# Altium PCB PCB1.PcbDoc
Units mm, origin at the board's own origin, x right, y up, seen from the top; angles counter-clockwise.
Board outline 99.44 x 101 mm, 2 copper layers (Top Layer, Bottom Layer); 111 components, 17 nets, 356 pads, 6 vias.
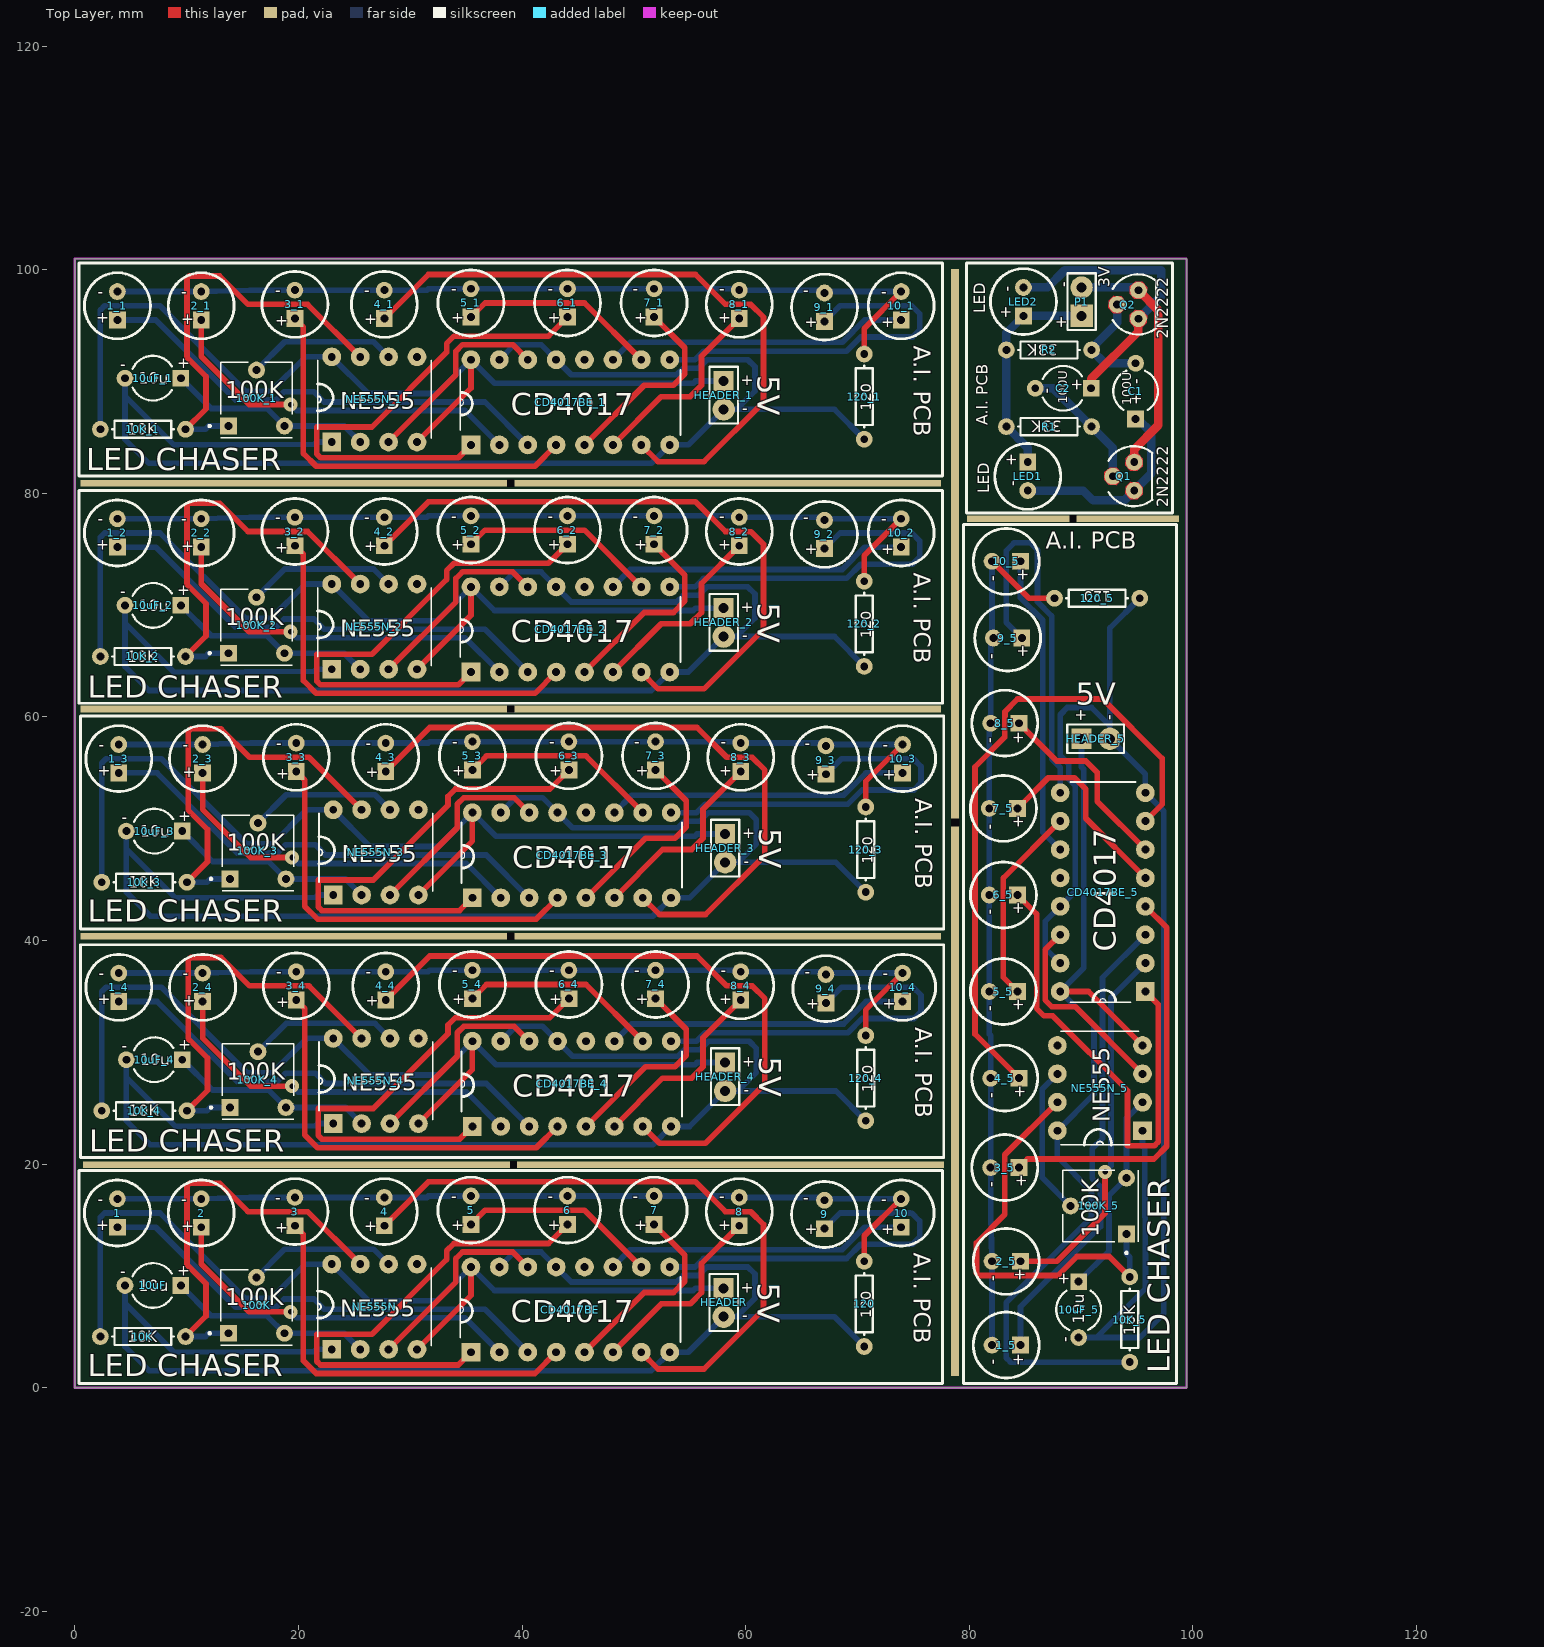
[diagram p0: Top Layer view]
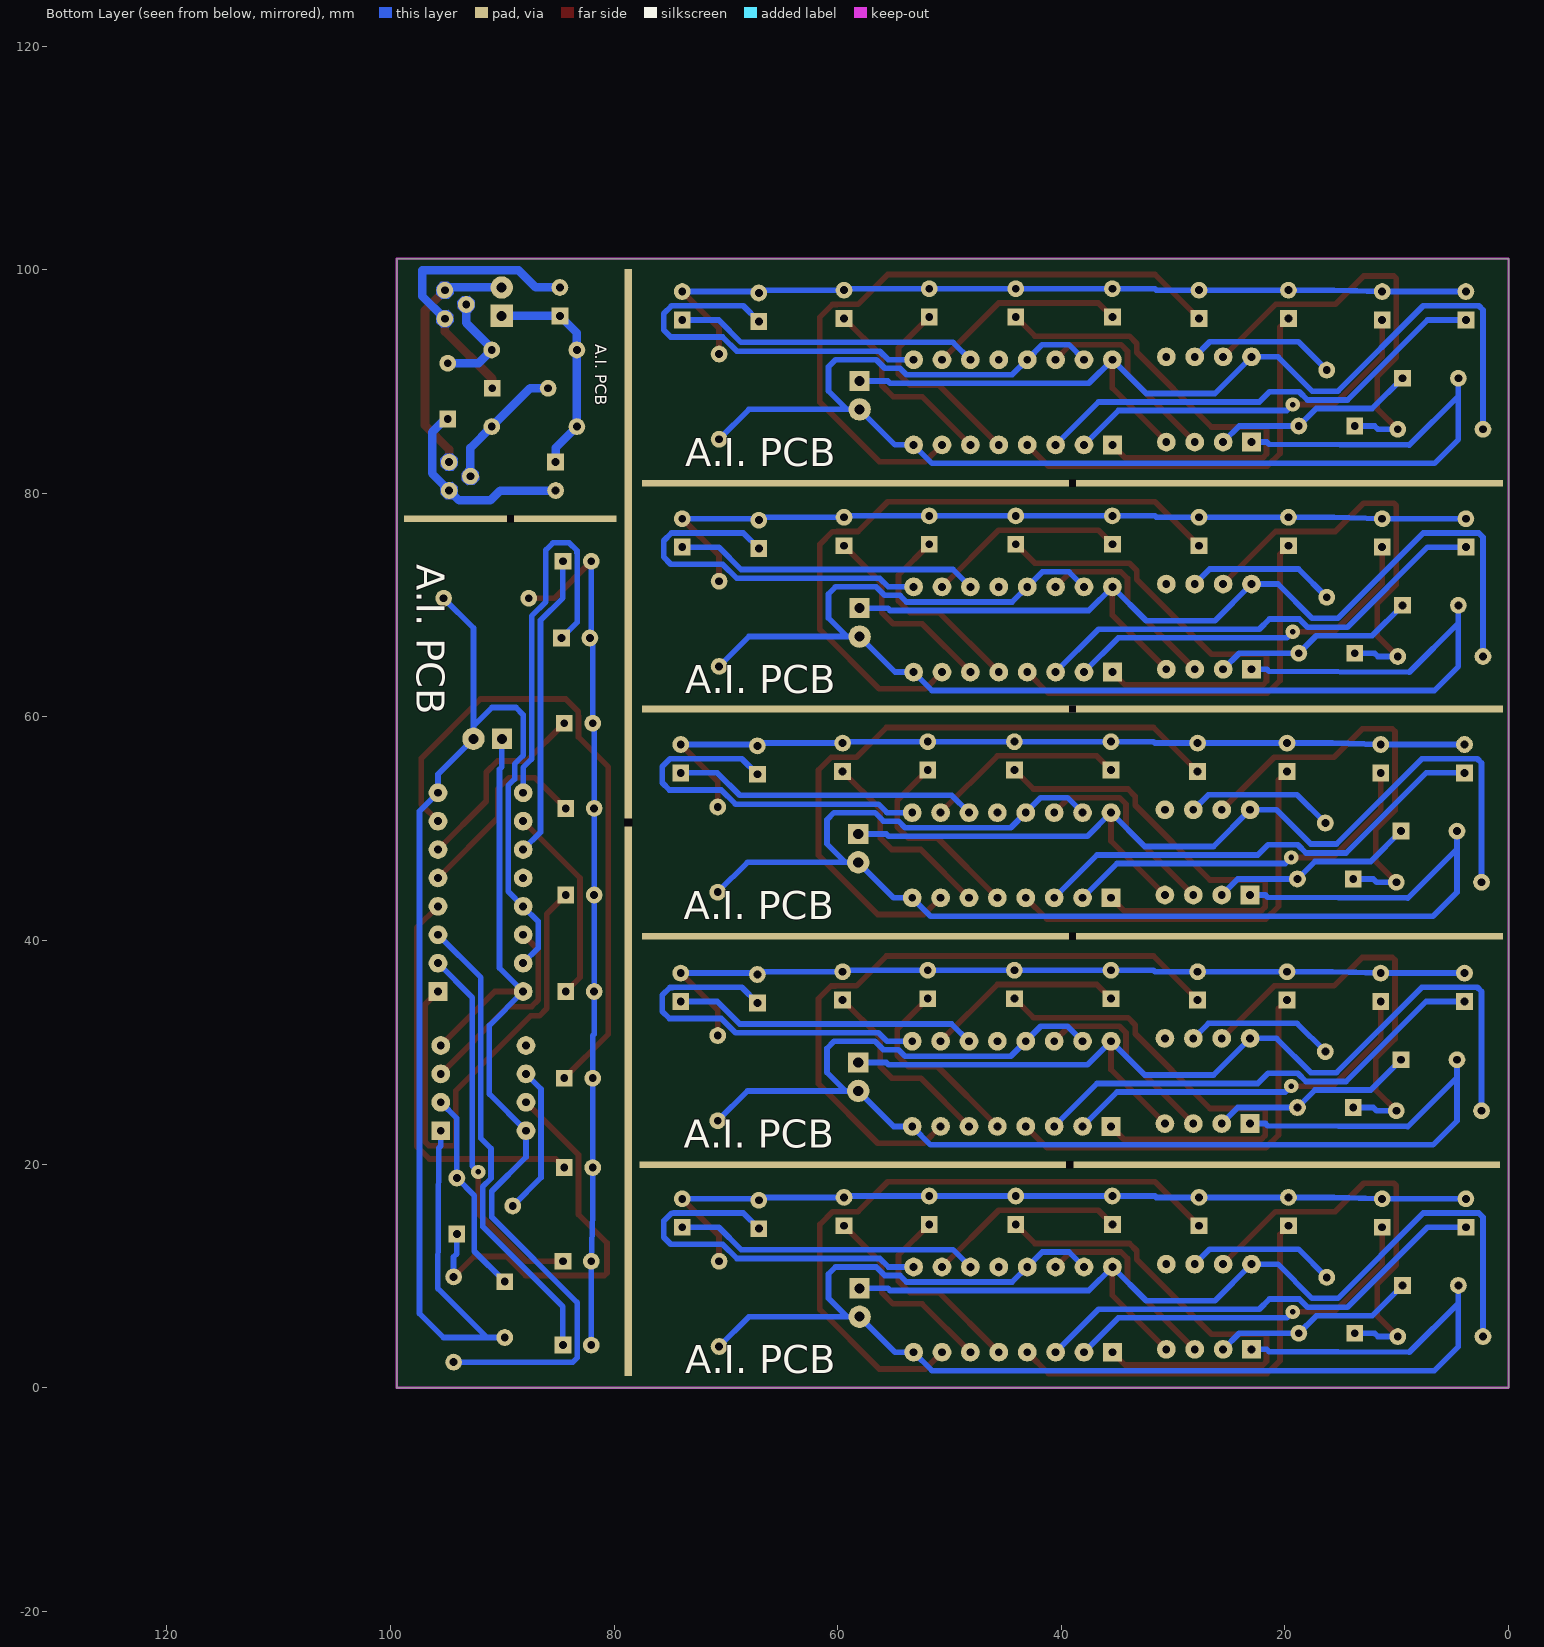
[diagram p1: Bottom Layer view, seen from below]

## Layer stack, top to bottom
Top Solder: solder mask 0.0102, Solder Resist, Dk 3.5
Top Layer: signal copper 0.0356
Dielectric 1: dielectric 0.32, FR-4, Dk 4.8
Bottom Layer: signal copper 0.0356
Bottom Solder: solder mask 0.0102, Solder Resist, Dk 3.5

## Board outline
0,0 0,101 99.441,101 99.441,0

## Design rules (kind name [scope] priority, off if disabled: settings)
Clearance [All] p1: gap=0.254 ignorepadtopadclearanceinfootprint=FALSE except(0: Arc-Hole Track-Hole SMDPad-Hole THPad-Hole Via-Hole Fill-Hole Poly-Hole Region-Hole Text-Hole)
PolygonConnect [All] p1: connectstyle=Relief reliefconductorwidth=0.254 reliefentries=4 polygonreliefangle="90 Angle" airgapwidth=0.254
RoutingVias [All] p1: holewidth=0.711 width=1.27 viastyle="Through Hole" minholewidth=0.711 minwidth=1.27 maxholewidth=0.711 maxwidth=1.27
SolderMaskExpansion [All] p1: expansion=0.102
Width [All] p1: maxlimit=0.762 minlimit=0.254 preferedwidth=0.508
30 further rules are at their usual default settings.

## Classes and differential pairs
component class Sheet1: 1 2 3 4 5 6 7 8 9 10 10K 10uF 100K 120 CD4017BE HEADER LED1 LED2 LED3 LED4 LED5 LED6 LED7 LED8 LED10 LED11 NE555N R1 U1

## Components (designator, comment, footprint, x,y, rotation, side; value= is the part's Value field where it differs from the comment)
1 "1" L-53GD 3.81,15.621 r90 top
1_1 "1" L-53GD 3.81,96.774 r90 top (schematic designator 1)
1_2 "1" L-53GD 3.81,76.454 r90 top (schematic designator 1)
1_3 "1" L-53GD 3.937,56.261 r90 top (schematic designator 1)
1_4 "1" L-53GD 3.937,35.814 r90 top (schematic designator 1)
1_5 "1" L-53GD 83.312,3.81 r180 top (schematic designator 1)
2 "1" L-53GD 11.303,15.621 r90 top
2_1 "1" L-53GD 11.303,96.774 r90 top (schematic designator 2)
2_2 "1" L-53GD 11.303,76.454 r90 top (schematic designator 2)
2_3 "1" L-53GD 11.43,56.261 r90 top (schematic designator 2)
2_4 "1" L-53GD 11.43,35.814 r90 top (schematic designator 2)
2_5 "1" L-53GD 83.312,11.303 r180 top (schematic designator 2)
3 "3" L-53GD 19.685,15.748 r90 top
3_1 "3" L-53GD 19.685,96.901 r90 top (schematic designator 3)
3_2 "3" L-53GD 19.685,76.581 r90 top (schematic designator 3)
3_3 "3" L-53GD 19.812,56.388 r90 top (schematic designator 3)
3_4 "3" L-53GD 19.812,35.941 r90 top (schematic designator 3)
3_5 "3" L-53GD 83.185,19.685 r180 top (schematic designator 3)
4 "4" L-53GD 27.686,15.748 r90 top
4_1 "4" L-53GD 27.686,96.901 r90 top (schematic designator 4)
4_2 "4" L-53GD 27.686,76.581 r90 top (schematic designator 4)
4_3 "4" L-53GD 27.813,56.388 r90 top (schematic designator 4)
4_4 "4" L-53GD 27.813,35.941 r90 top (schematic designator 4)
4_5 "4" L-53GD 83.185,27.686 r180 top (schematic designator 4)
5 "5" L-53GD 35.433,15.875 r90 top
5_1 "5" L-53GD 35.433,97.028 r90 top (schematic designator 5)
5_2 "5" L-53GD 35.433,76.708 r90 top (schematic designator 5)
5_3 "5" L-53GD 35.56,56.515 r90 top (schematic designator 5)
5_4 "5" L-53GD 35.56,36.068 r90 top (schematic designator 5)
5_5 "5" L-53GD 83.058,35.433 r180 top (schematic designator 5)
6 "6" L-53GD 44.069,15.875 r90 top
6_1 "6" L-53GD 44.069,97.028 r90 top (schematic designator 6)
6_2 "6" L-53GD 44.069,76.708 r90 top (schematic designator 6)
6_3 "6" L-53GD 44.196,56.515 r90 top (schematic designator 6)
6_4 "6" L-53GD 44.196,36.068 r90 top (schematic designator 6)
6_5 "6" L-53GD 83.058,44.069 r180 top (schematic designator 6)
7 "7" L-53GD 51.816,15.875 r90 top
7_1 "7" L-53GD 51.816,97.028 r90 top (schematic designator 7)
7_2 "7" L-53GD 51.816,76.708 r90 top (schematic designator 7)
7_3 "7" L-53GD 51.943,56.515 r90 top (schematic designator 7)
7_4 "7" L-53GD 51.943,36.068 r90 top (schematic designator 7)
7_5 "7" L-53GD 83.058,51.816 r180 top (schematic designator 7)
8 "8" L-53GD 59.436,15.748 r90 top
8_1 "8" L-53GD 59.436,96.901 r90 top (schematic designator 8)
8_2 "8" L-53GD 59.436,76.581 r90 top (schematic designator 8)
8_3 "8" L-53GD 59.563,56.388 r90 top (schematic designator 8)
8_4 "8" L-53GD 59.563,35.941 r90 top (schematic designator 8)
8_5 "8" L-53GD 83.185,59.436 r180 top (schematic designator 8)
9 "9" L-53GD 67.056,15.494 r90 top
9_1 "9" L-53GD 67.056,96.647 r90 top (schematic designator 9)
9_2 "9" L-53GD 67.056,76.327 r90 top (schematic designator 9)
9_3 "9" L-53GD 67.183,56.134 r90 top (schematic designator 9)
9_4 "9" L-53GD 67.183,35.687 r90 top (schematic designator 9)
9_5 "9" L-53GD 83.439,67.056 r180 top (schematic designator 9)
10 "10" L-53GD 73.914,15.621 r90 top
10_1 "10" L-53GD 73.914,96.774 r90 top (schematic designator 10)
10_2 "10" L-53GD 73.914,76.454 r90 top (schematic designator 10)
10_3 "10" L-53GD 74.041,56.261 r90 top (schematic designator 10)
10_4 "10" L-53GD 74.041,35.814 r90 top (schematic designator 10)
10_5 "10" L-53GD 83.312,73.914 r180 top (schematic designator 10)
10K "Res1" AXIAL-0.3 6.096,4.572 r0 top value=10K
10K_1 "Res1" AXIAL-0.3 6.096,85.725 r0 top value=10K (schematic designator 10K)
10K_2 "Res1" AXIAL-0.3 6.096,65.405 r0 top value=10K (schematic designator 10K)
10K_3 "Res1" AXIAL-0.3 6.223,45.212 r0 top value=10K (schematic designator 10K)
10K_4 "Res1" AXIAL-0.3 6.223,24.765 r0 top value=10K (schematic designator 10K)
10K_5 "Res1" AXIAL-0.3 94.361,6.096 r90 top value=10K (schematic designator 10K)
10uF "Cap2" CAPR5-4X5 6.985,9.144 r180 top value=10uF
10uF_1 "Cap2" CAPR5-4X5 6.985,90.297 r180 top value=10uF (schematic designator 10uF)
10uF_2 "Cap2" CAPR5-4X5 6.985,69.977 r180 top value=10uF (schematic designator 10uF)
10uF_3 "Cap2" CAPR5-4X5 7.112,49.784 r180 top value=10uF (schematic designator 10uF)
10uF_4 "Cap2" CAPR5-4X5 7.112,29.337 r180 top value=10uF (schematic designator 10uF)
10uF_5 "Cap2" CAPR5-4X5 89.789,6.985 r270 top value=10uF (schematic designator 10uF)
100K "100K" *TRIM_EVN-D8AA03B14 16.256,7.366 r0 top
100K_1 "100K" *TRIM_EVN-D8AA03B14 16.256,88.519 r0 top (schematic designator 100K)
100K_2 "100K" *TRIM_EVN-D8AA03B14 16.256,68.199 r0 top (schematic designator 100K)
100K_3 "100K" *TRIM_EVN-D8AA03B14 16.383,48.006 r0 top (schematic designator 100K)
100K_4 "100K" *TRIM_EVN-D8AA03B14 16.383,27.559 r0 top (schematic designator 100K)
100K_5 "100K" *TRIM_EVN-D8AA03B14 91.567,16.256 r90 top (schematic designator 100K)
120 "120" AXIAL-0.3 70.612,7.493 r270 top value=1K
120_1 "120" AXIAL-0.3 70.612,88.646 r270 top value=1K (schematic designator 120)
120_2 "120" AXIAL-0.3 70.612,68.326 r270 top value=1K (schematic designator 120)
120_3 "120" AXIAL-0.3 70.739,48.133 r270 top value=1K (schematic designator 120)
120_4 "120" AXIAL-0.3 70.739,27.686 r270 top value=1K (schematic designator 120)
120_5 "120" AXIAL-0.3 91.44,70.612 r0 top value=1K (schematic designator 120)
C1 "Cap1" CAPR5-4X5 94.885,89.138 r90 top value=100uF
C2 "Cap2" CAPR5-4X5 88.408,89.392 r180 top value=100uF
CD4017BE "CD4017BE" *DIP254P762X508-16 53.213,10.795 r90 top
CD4017BE_1 "CD4017BE" *DIP254P762X508-16 53.213,91.948 r90 top (schematic designator CD4017BE)
CD4017BE_2 "CD4017BE" *DIP254P762X508-16 53.213,71.628 r90 top (schematic designator CD4017BE)
CD4017BE_3 "CD4017BE" *DIP254P762X508-16 53.34,51.435 r90 top (schematic designator CD4017BE)
CD4017BE_4 "CD4017BE" *DIP254P762X508-16 53.34,30.988 r90 top (schematic designator CD4017BE)
CD4017BE_5 "CD4017BE" *DIP254P762X508-16 88.138,53.213 r180 top (schematic designator CD4017BE)
HEADER "Header 2" HDR1X2#1 58.039,8.89 r270 top
HEADER_1 "Header 2" HDR1X2#1 58.039,90.043 r270 top (schematic designator HEADER)
HEADER_2 "Header 2" HDR1X2#1 58.039,69.723 r270 top (schematic designator HEADER)
HEADER_3 "Header 2" HDR1X2#1 58.166,49.53 r270 top (schematic designator HEADER)
HEADER_4 "Header 2" HDR1X2#1 58.166,29.083 r270 top (schematic designator HEADER)
HEADER_5 "Header 2" HDR1X2#1 90.043,58.039 r0 top (schematic designator HEADER)
LED1 "L-53GD" L-53GD 85.233,81.518 r270 top
LED2 "L-53GD" L-53GD 84.852,97.139 r90 top
NE555N "NE555N" *DIP254P762X533-8 30.607,11.049 r90 top
NE555N_1 "NE555N" *DIP254P762X533-8 30.607,92.202 r90 top (schematic designator NE555N)
NE555N_2 "NE555N" *DIP254P762X533-8 30.607,71.882 r90 top (schematic designator NE555N)
NE555N_3 "NE555N" *DIP254P762X533-8 30.734,51.689 r90 top (schematic designator NE555N)
NE555N_4 "NE555N" *DIP254P762X533-8 30.734,31.242 r90 top (schematic designator NE555N)
NE555N_5 "NE555N" *DIP254P762X533-8 87.884,30.607 r180 top (schematic designator NE555N)
P1 "Header 2" HDR1X2#2 90.059,95.869 r90 top
Q1 "P2N2222A" *TO92 94.758,81.518 r90 top
Q2 "P2N2222A" *TO92 95.139,96.885 r90 top
R1 "Res1" AXIAL-0.3 87.138,85.963 r180 top value=33K
R2 "Res1" AXIAL-0.3 87.138,92.821 r180 top value=33K

## Footprints (in the part's own frame and the unit in brackets; to place one, negate y for a bottom-side part, rotate by r counter-clockwise, add the part's x,y. Pads: shape width x height; smd on the part's side, far side on the other; paste and mask are expansions set on the pad)
*DIP254P762X508-16 [mil]
  rect 66x66 hole 27.56: 1(-300,700)
  round 66 hole 27.56: 2(-300,600) 3(-300,500) 4(-300,400) 5(-300,300) 6(-300,200) 7(-300,100) 8(-300,0) 9(0,0) 10(0,100) 11(0,200) 12(0,300) 13(0,400) 14(0,500) 15(0,600) 16(0,700)
  silkscreen extent -265,-38 -35,738
*DIP254P762X533-8 [mil]
  rect 66x66 hole 27.56: 1(-300,300)
  round 66 hole 27.56: 2(-300,200) 3(-300,100) 4(-300,0) 5(0,0) 6(0,100) 7(0,200) 8(0,300)
  silkscreen extent -287,-50 -13,350
*TO92 [mm]
  round 1.5 hole 0.7: 1(1.27,0) 2(0,1.905) 3(-1.27,0)
  Top Layer region: -0.482,0.287 -0.916,0.76 -1.557,0.788 -2.03,0.354 -2.058,-0.287 -1.624,-0.76 -0.983,-0.788 -0.51,-0.354
  Top Layer region: 0.788,2.192 0.354,2.665 -0.287,2.693 -0.76,2.259 -0.788,1.618 -0.354,1.145 0.287,1.117 0.76,1.551
  Top Layer region: 2.058,0.287 1.624,0.76 0.983,0.788 0.51,0.354 0.482,-0.287 0.916,-0.76 1.557,-0.788 2.03,-0.354
  Bottom Layer region: -0.482,0.287 -0.916,0.76 -1.557,0.788 -2.03,0.354 -2.058,-0.287 -1.624,-0.76 -0.983,-0.788 -0.51,-0.354
  Bottom Layer region: 0.788,2.192 0.354,2.665 -0.287,2.693 -0.76,2.259 -0.788,1.618 -0.354,1.145 0.287,1.117 0.76,1.551
  Bottom Layer region: 2.058,0.287 1.624,0.76 0.983,0.788 0.51,0.354 0.482,-0.287 0.916,-0.76 1.557,-0.788 2.03,-0.354
  Multi-Layer region: -0.482,0.287 -0.916,0.76 -1.557,0.788 -2.03,0.354 -2.058,-0.287 -1.624,-0.76 -0.983,-0.788 -0.51,-0.354
  Multi-Layer region: 0.788,2.192 0.354,2.665 -0.287,2.693 -0.76,2.259 -0.788,1.618 -0.354,1.145 0.287,1.117 0.76,1.551
  Multi-Layer region: 2.058,0.287 1.624,0.76 0.983,0.788 0.51,0.354 0.482,-0.287 0.916,-0.76 1.557,-0.788 2.03,-0.354
  silkscreen extent -2.68,-1.61 2.7,2.3
*TRIM_EVN-D8AA03B14 [mm]
  rect 1.5x1.5 hole 0.7: 1(-2.5,-2.5)
  round 1.508 hole 0.7: 2(0,2.5) 3(2.5,-2.5)
  silkscreen extent -4.3,-3.57 3.2,3.2
AXIAL-0.3 [mm] "Axial Device, Thru-Hole; 2 Leads; 0.3 in Pin Spacing"
  round 1.5 hole 0.7: 1(-3.81,0) 2(3.81,0)
  silkscreen extent -2.77,-0.76 2.77,0.76
CAPR5-4X5 [mm] "Capacitor; 2 Leads"
  rect 1.5x1.5 hole 0.7: 1(-2.5,0)
  round 1.5 hole 0.7: 2(2.5,0)
  silkscreen extent -1.69,-2 1.82,2
HDR1X2#1 [mm] "Connector; Header; 2 Position"
  rect 1.8x1.8 hole 0.9: 1(0,0)
  round 2 hole 0.9: 2(2.54,0)
  silkscreen extent -1.27,-1.27 3.81,1.27
HDR1X2#2 [mm] "Connector; Header; 2 Position"
  rect 2x2 hole 0.9: 1(0,0)
  round 2 hole 0.9: 2(2.54,0)
  silkscreen extent -1.27,-1.27 3.81,1.27
L-53GD [mm]
  rect 1.5x1.5 hole 0.7: 1(-1.27,0)
  round 1.5 hole 0.7: 2(1.27,0)
  silkscreen extent -2.95,-2.95 2.95,2.95

## Part data
1 1_1 1_2 1_3 1_4 1_5 2 2_1 2_2 2_3 2_4 2_5 3 3_1 3_2 3_3 3_4 3_5 4 4_1 4_2 4_3 4_4 4_5 5 5_1 5_2 5_3 5_4 5_5 6 6_1 6_2 6_3 6_4 6_5 7 7_1 7_2 7_3 7_4 7_5 8 8_1 8_2 8_3 8_4 8_5 9 9_1 9_2 9_3 9_4 9_5 10 10_1 10_2 10_3 10_4 10_5: library part L-53GD, "LED", Manufacturer_Name=Kingbright, Mouser Part Number=N/A, RS Part Number=2286004A, Allied_Number=70424261, Allied Price/Stock=http://www.alliedelec.com/kingbright-l-53gd/70424261/, Datasheet Link=http://docs-emea.rs-online.com/webdocs/151e/0900766b8151e408.pdf, Manufacturer_Part_Number=L-53GD, Mouser Price/Stock=https://www.mouser.com/Search/Refine.aspx?Keyword=N%2FA, RS Price/Stock=http://uk.rs-online.com/web/p/products/2286004A
10K 10K_1 10K_2 10K_3 10K_4 10K_5 R1 R2: "Resistor", LatestRevisionDate=17-Jul-2002, LatestRevisionNote="Re-released for DXP Platform.", PackageDescription="Axial Device, Thru-Hole; 2 Leads; 0.3 in Pin Spacing", PackageReference=AXIAL-0.3, Published=8-Jun-2000, Publisher="Altium Limited"
10uF 10uF_1 10uF_2 10uF_3 10uF_4 10uF_5 C2: "Capacitor", PackageDescription="Capacitor; 2 Leads", PackageReference=CAPR5-4X5, Published=23-Sep-2002, Publisher="Altium Limited"
100K 100K_1 100K_2 100K_3 100K_4 100K_5: library part EVN-D8AA03B14, "Trimmer; Carbon; Rest 10 Kilohms; PCB; 1 Turn; Pwr-Rtg 0.1 W; Linear; Top Adj; 6 mm SQ", Package="PQFP-44 Panasonic", Availability=Unavailable, MF="Panasonic Electronic", MP=EVN-D8AA03B14, Price=None, SnapEDA_Link=https://www.snapeda.com/parts/EVN-D8AA03B14/Panasonic%20Electronic%20Components/view-part/?ref=snap
120 120_1 120_2 120_3 120_4 120_5: library part Res1, "Resistor", LatestRevisionDate=17-Jul-2002, LatestRevisionNote="Re-released for DXP Platform.", PackageDescription="Axial Device, Thru-Hole; 2 Leads; 0.3 in Pin Spacing", PackageReference=AXIAL-0.3, Published=8-Jun-2000, Publisher="Altium Limited"
C1: library part Cap2, "Capacitor", PackageDescription="Capacitor; 2 Leads", PackageReference=CAPR5-4X5, Published=23-Sep-2002, Publisher="Altium Limited"
CD4017BE CD4017BE_1 CD4017BE_2 CD4017BE_3 CD4017BE_4 CD4017BE_5: "IC Mos 4017/CD4017BE HARRIS", Package="DIP-16 Intersil", Availability=Unavailable, MF=Texas, MP=CD4017BE, Price=None, SnapEDA_Link=https://www.snapeda.com/parts/CD4017BE/Texas%20Instruments/view-part/?ref=snap
HEADER HEADER_1 HEADER_2 HEADER_3 HEADER_4 HEADER_5 P1: "Header, 2-Pin", LatestRevisionDate=17-Jul-2002, LatestRevisionNote="Re-released for DXP Platform.", Publisher="Altium Limited"
LED1 LED2: "LED", Manufacturer_Name=Kingbright, Mouser Part Number=N/A, RS Part Number=2286004A, Allied_Number=70424261, Allied Price/Stock=http://www.alliedelec.com/kingbright-l-53gd/70424261/, Datasheet Link=http://docs-emea.rs-online.com/webdocs/151e/0900766b8151e408.pdf, Manufacturer_Part_Number=L-53GD, Mouser Price/Stock=https://www.mouser.com/Search/Refine.aspx?Keyword=N%2FA, RS Price/Stock=http://uk.rs-online.com/web/p/products/2286004A
NE555N NE555N_1 NE555N_2 NE555N_3 NE555N_4 NE555N_5: Package="DIP-8 Texas Instruments", Availability=Unavailable, MF="ON Semiconductor", MP=NE555N, Price=None, SnapEDA_Link=https://www.snapeda.com/parts/NE555N/ON%20Semiconductor/view-part/?ref=snap
Q1 Q2: Package="TO-92 NXP Semiconductors", Availability=Unavailable, MF="ON Semiconductor", MP=P2N2222A, Price=None, SnapEDA_Link=https://www.snapeda.com/parts/P2N2222A/ON%20Semiconductor/view-part/?ref=snap

## Free pads (board coordinates)
  rect 77x0.6 hole 0.6 square: 2(38.989,40.386) 2(38.989,60.706) 2(38.989,80.899) 2(39.243,19.939)
  rect 0.7x99 hole 0.7 square: 4(78.74,50.546)
  rect 19x0.6 hole 0.6 square: 5(89.281,77.724)

## Via types
v1: diameter 1.27, hole 0.5, Top Layer to Bottom Layer, 6 vias

## Nets (pads, with @x,y where several pads share a name; then routed paths per layer and width w, separated by ;. In a path a pad name is that pad's centre, name@x,y a point inside that pad or via, vN(x,y) a via of type N, cw(c..) or ccw(c..) an arc to the next point about the centre after c; other vN are vias at no path point)
Net1_1: 1.1 CD4017BE.3 | length 41.9
  Bottom Layer w0.508: 1.1 7.239,14.351 14.402,7.188 17.983,7.188 18.72,7.925 21.387,7.925 22.301,7.01 36.678,7.01 CD4017BE.3
Net1_2: 1.2 2.2 3.2 4.2 5.2 6.2 7.2 8.2 9.2 10.2 120.1 | length 77.3
  Top Layer w0.508: 120.1 70.612,13.589 10.2
  Bottom Layer w0.508: 1.2 2.2 15.621,17.018 3.2 4.2 31.496,17.018 31.623,17.145 5.2 6.2 7.2 59.309,17.145 8.2 66.802,17.018 9.2 67.183,16.891 10.2
Net2_1: 2.1 CD4017BE.2 | length 33.2
  Top Layer w0.508: 2.1 11.303,11.074 15.596,6.782 v1(19.304,6.782)
  Bottom Layer w0.508: v1(19.304,6.782) 19.837,6.248 34.9,6.248 CD4017BE.2
Net3_1: 3.1 CD4017BE.4 | length 36.2
  Top Layer w0.508: 3.1 20.447,13.716 20.447,2.413 21.59,1.27 41.148,1.27 CD4017BE.4
Net4_1: 4.1 CD4017BE.7 | length 58.5
  Top Layer w0.508: 4.1 31.623,18.415 55.524,18.415 58.191,15.748 60.071,15.748 60.083,15.736 60.464,15.736 61.595,14.605 61.595,6.985 56.286,1.676 52.172,1.676 CD4017BE.7
Net5_1: 5.1 CD4017BE.10 | length 17.9
  Top Layer w0.508: 5.1 36.703,15.875 45.593,15.875 CD4017BE.10
Net6_1: 6.1 CD4017BE.1 | length 43.8
  Top Layer w0.508: CD4017BE.1 34.29,2.032 21.971,2.032 21.641,2.362 21.641,4.775 26.568,4.775 33.256,11.463 33.256,12.25 33.909,12.903 42.367,12.903 6.1
Net7_1: 7.1 CD4017BE.5 | length 17.8
  Top Layer w0.508: CD4017BE.5 50.927,8.509 53.543,8.509 54.559,9.525 54.559,11.862 7.1
Net8_1: 8.1 CD4017BE.6 | length 17.5
  Top Layer w0.508: CD4017BE.6 52.451,7.493 55.042,7.493 56.058,8.509 56.058,11.1 8.1
Net9_1: 9.1 CD4017BE.9 | length 34.3
  Bottom Layer w0.508: CD4017BE.9 55.474,10.795 56.236,11.557 69.023,11.557 70.293,12.827 74.93,12.827 75.565,13.462 75.565,14.918 74.874,15.609 74.688,15.609 74.676,15.621 68.453,15.621 9.1
Net10_1: 10.1 CD4017BE.11 | length 27.3
  Bottom Layer w0.508: CD4017BE.11 49.682,12.344 68.642,12.344 70.649,14.351 10.1
Net10K_1: 10K.1 CD4017BE.16 HEADER.1 NE555N.4 NE555N.8 | length 83.9
  Top Layer w0.508: NE555N.4 35.433,8.255 CD4017BE.16
  Bottom Layer w0.508: 10K.1 2.286,15.24 2.667,15.621 7.62,15.621 15.253,7.988 17.564,7.988 20.625,11.049 NE555N.8 26.264,7.772 32.41,7.772 CD4017BE.16 37.541,8.687 55.321,8.687 55.524,8.89 HEADER.1
Net10K_2: 10K.2 100K.1 NE555N.7 | length 37.5
  Top Layer w0.508: 10K.2 11.735,6.401 11.735,9.296 10.033,10.998 10.033,18.059 10.262,18.288 12.954,18.288 15.494,15.748 20.828,15.748 NE555N.7
  Bottom Layer w0.508: 10K.2 11.684,4.572 11.978,4.866 100K.1
Net10uF_1: 10uF.1 100K.3 NE555N.2 | length 18.4
  Bottom Layer w0.508: 10uF.1 12.203,6.426 17.196,6.426 100K.3 24.09,4.866 NE555N.2
Net10uF_2: 10uF.2 120.2 CD4017BE.8 CD4017BE.13 CD4017BE.15 HEADER.2 NE555N.1 | length 125.8
  Bottom Layer w0.508: 10uF.2 4.485,7.555 ; NE555N.1 21.615,3.429 21.427,3.238 8.875,3.164 4.485,7.555 ; CD4017BE.15 39.319,12.141 41.707,12.141 CD4017BE.13 44.399,9.449 53.848,9.449 54.432,10.033 55.789,10.033 56.551,10.795 60.198,10.795 60.833,10.16 60.833,8.001 59.182,6.35 ; 120.2 67.945,6.35 59.182,6.35 ; 4.485,7.555 4.485,3.668 6.629,1.524 51.562,1.524 CD4017BE.8 54.864,3.175 HEADER.2 59.182,6.35
Net100K_2: 100K.2 NE555N.6 | length 13.4
  Bottom Layer w0.508: 100K.2 18.785,12.395 26.721,12.395 NE555N.6
NetCD4017BE_14: CD4017BE.14 NE555N.3 | length 17.8
  Top Layer w0.508: NE555N.3 34.087,9.449 34.087,11.557 34.671,12.141 39.167,12.141 CD4017BE.14
pads on no net: 1_1.1 1_1.2 1_2.1 1_2.2 1_3.1 1_3.2 1_4.1 1_4.2 1_5.1 1_5.2 2_1.1 2_1.2 2_2.1 2_2.2 2_3.1 2_3.2 2_4.1 2_4.2 2_5.1 2_5.2 3_1.1 3_1.2 3_2.1 3_2.2 3_3.1 3_3.2 3_4.1 3_4.2 3_5.1 3_5.2 4_1.1 4_1.2 4_2.1 4_2.2 4_3.1 4_3.2 4_4.1 4_4.2 4_5.1 4_5.2 5_1.1 5_1.2 5_2.1 5_2.2 5_3.1 5_3.2 5_4.1 5_4.2 5_5.1 5_5.2 6_1.1 6_1.2 6_2.1 6_2.2 6_3.1 6_3.2 6_4.1 6_4.2 6_5.1 6_5.2 7_1.1 7_1.2 7_2.1 7_2.2 7_3.1 7_3.2 7_4.1 7_4.2 7_5.1 7_5.2 8_1.1 8_1.2 8_2.1 8_2.2 8_3.1 8_3.2 8_4.1 8_4.2 8_5.1 8_5.2 9_1.1 9_1.2 9_2.1 9_2.2 9_3.1 9_3.2 9_4.1 9_4.2 9_5.1 9_5.2 10_1.1 10_1.2 10_2.1 10_2.2 10_3.1 10_3.2 10_4.1 10_4.2 10_5.1 10_5.2 10K_1.1 10K_1.2 10K_2.1 10K_2.2 10K_3.1 10K_3.2 10K_4.1 10K_4.2 10K_5.1 10K_5.2 10uF_1.1 10uF_1.2 10uF_2.1 10uF_2.2 10uF_3.1 10uF_3.2 10uF_4.1 10uF_4.2 10uF_5.1 10uF_5.2 100K_1.1 100K_1.2 100K_1.3 100K_2.1 100K_2.2 100K_2.3 100K_3.1 100K_3.2 100K_3.3 100K_4.1 100K_4.2 100K_4.3 100K_5.1 100K_5.2 100K_5.3 120_1.1 120_1.2 120_2.1 120_2.2 120_3.1 120_3.2 120_4.1 120_4.2 120_5.1 120_5.2 C1.1 C1.2 C2.1 C2.2 CD4017BE.12 CD4017BE_1.1 CD4017BE_1.2 CD4017BE_1.3 CD4017BE_1.4 CD4017BE_1.5 CD4017BE_1.6 CD4017BE_1.7 CD4017BE_1.8 CD4017BE_1.9 CD4017BE_1.10 CD4017BE_1.11 CD4017BE_1.12 CD4017BE_1.13 CD4017BE_1.14 CD4017BE_1.15 CD4017BE_1.16 CD4017BE_2.1 CD4017BE_2.2 CD4017BE_2.3 CD4017BE_2.4 CD4017BE_2.5 CD4017BE_2.6 CD4017BE_2.7 CD4017BE_2.8 CD4017BE_2.9 CD4017BE_2.10 CD4017BE_2.11 CD4017BE_2.12 CD4017BE_2.13 CD4017BE_2.14 CD4017BE_2.15 CD4017BE_2.16 CD4017BE_3.1 CD4017BE_3.2 CD4017BE_3.3 CD4017BE_3.4 CD4017BE_3.5 CD4017BE_3.6 CD4017BE_3.7 CD4017BE_3.8 CD4017BE_3.9 CD4017BE_3.10 CD4017BE_3.11 CD4017BE_3.12 CD4017BE_3.13 CD4017BE_3.14 CD4017BE_3.15 CD4017BE_3.16 CD4017BE_4.1 CD4017BE_4.2 CD4017BE_4.3 CD4017BE_4.4 CD4017BE_4.5 CD4017BE_4.6 CD4017BE_4.7 CD4017BE_4.8 CD4017BE_4.9 CD4017BE_4.10 CD4017BE_4.11 CD4017BE_4.12 CD4017BE_4.13 CD4017BE_4.14 CD4017BE_4.15 CD4017BE_4.16 CD4017BE_5.1 CD4017BE_5.2 CD4017BE_5.3 CD4017BE_5.4 CD4017BE_5.5 CD4017BE_5.6 CD4017BE_5.7 CD4017BE_5.8 CD4017BE_5.9 CD4017BE_5.10 CD4017BE_5.11 CD4017BE_5.12 CD4017BE_5.13 CD4017BE_5.14 CD4017BE_5.15 CD4017BE_5.16 HEADER_1.1 HEADER_1.2 HEADER_2.1 HEADER_2.2 HEADER_3.1 HEADER_3.2 HEADER_4.1 HEADER_4.2 HEADER_5.1 HEADER_5.2 LED1.1 LED1.2 LED2.1 LED2.2 NE555N.5 NE555N_1.1 NE555N_1.2 NE555N_1.3 NE555N_1.4 NE555N_1.5 NE555N_1.6 NE555N_1.7 NE555N_1.8 NE555N_2.1 NE555N_2.2 NE555N_2.3 NE555N_2.4 NE555N_2.5 NE555N_2.6 NE555N_2.7 NE555N_2.8 NE555N_3.1 NE555N_3.2 NE555N_3.3 NE555N_3.4 NE555N_3.5 NE555N_3.6 NE555N_3.7 NE555N_3.8 NE555N_4.1 NE555N_4.2 NE555N_4.3 NE555N_4.4 NE555N_4.5 NE555N_4.6 NE555N_4.7 NE555N_4.8 NE555N_5.1 NE555N_5.2 NE555N_5.3 NE555N_5.4 NE555N_5.5 NE555N_5.6 NE555N_5.7 NE555N_5.8 P1.1 P1.2 Q1.1 Q1.2 Q1.3 Q2.1 Q2.2 Q2.3 R1.1 R1.2 R2.1 R2.2
copper on no net: | length 3620.5
  Top Layer w0.508: 9.906,65.405 11.735,67.234 11.735,70.129 10.033,71.831 10.033,78.892 10.262,79.121 12.954,79.121 15.494,76.581 20.828,76.581 25.527,71.882 ; 9.906,85.725 11.735,87.554 11.735,90.449 10.033,92.151 10.033,99.212 10.262,99.441 12.954,99.441 15.494,96.901 20.828,96.901 25.527,92.202 ; 10.033,24.765 11.862,26.594 11.862,29.489 10.16,31.191 10.16,38.252 10.389,38.481 13.081,38.481 15.621,35.941 20.955,35.941 25.654,31.242 ; 10.033,45.212 11.862,47.041 11.862,49.936 10.16,51.638 10.16,58.699 10.389,58.928 13.081,58.928 15.621,56.388 20.955,56.388 25.654,51.689 ; 11.303,75.184 11.303,71.907 15.596,67.615 v1(19.304,67.615) ; 11.303,95.504 11.303,92.227 15.596,87.935 v1(19.304,87.935) ; 11.43,34.544 11.43,31.267 15.723,26.975 v1(19.431,26.975) ; 11.43,54.991 11.43,51.714 15.723,47.422 v1(19.431,47.422) ; 19.685,75.311 20.447,74.549 20.447,63.246 21.59,62.103 41.148,62.103 43.053,64.008 ; 19.685,95.631 20.447,94.869 20.447,83.566 21.59,82.423 41.148,82.423 43.053,84.328 ; 19.812,34.671 20.574,33.909 20.574,22.606 21.717,21.463 41.275,21.463 43.18,23.368 ; 19.812,55.118 20.574,54.356 20.574,43.053 21.717,41.91 41.275,41.91 43.18,43.815 ; 27.686,75.311 31.623,79.248 55.524,79.248 58.191,76.581 60.071,76.581 60.083,76.569 60.464,76.569 61.595,75.438 61.595,67.818 56.286,62.509 52.172,62.509 50.673,64.008 ; 27.686,95.631 31.623,99.568 55.524,99.568 58.191,96.901 60.071,96.901 60.083,96.889 60.464,96.889 61.595,95.758 61.595,88.138 56.286,82.829 52.172,82.829 50.673,84.328 ; 27.813,34.671 31.75,38.608 55.651,38.608 58.318,35.941 60.198,35.941 60.21,35.929 60.591,35.929 61.722,34.798 61.722,27.178 56.413,21.869 52.299,21.869 50.8,23.368 ; 27.813,55.118 31.75,59.055 55.651,59.055 58.318,56.388 60.198,56.388 60.21,56.376 60.591,56.376 61.722,55.245 61.722,47.625 56.413,42.316 52.299,42.316 50.8,43.815 ; 28.067,64.262 34.087,70.282 34.087,72.39 34.671,72.974 39.167,72.974 40.513,71.628 ; 28.067,84.582 34.087,90.602 34.087,92.71 34.671,93.294 39.167,93.294 40.513,91.948 ; 28.194,23.622 34.214,29.642 34.214,31.75 34.798,32.334 39.294,32.334 40.64,30.988 ; 28.194,44.069 34.214,50.089 34.214,52.197 34.798,52.781 39.294,52.781 40.64,51.435 ; 30.607,64.262 35.433,69.088 35.433,71.628 ; 30.607,84.582 35.433,89.408 35.433,91.948 ; 30.734,23.622 35.56,28.448 35.56,30.988 ; 30.734,44.069 35.56,48.895 35.56,51.435 ; 35.433,64.008 34.29,62.865 21.971,62.865 21.641,63.195 21.641,65.608 26.568,65.608 33.256,72.296 33.256,73.083 33.909,73.736 42.367,73.736 44.069,75.438 ; 35.433,75.438 36.703,76.708 45.593,76.708 50.673,71.628 ; 35.433,84.328 34.29,83.185 21.971,83.185 21.641,83.515 21.641,85.928 26.568,85.928 33.256,92.616 33.256,93.403 33.909,94.056 42.367,94.056 44.069,95.758 ; 35.433,95.758 36.703,97.028 45.593,97.028 50.673,91.948 ; 35.56,23.368 34.417,22.225 22.098,22.225 21.768,22.555 21.768,24.968 26.695,24.968 33.383,31.656 33.383,32.443 34.036,33.096 42.494,33.096 44.196,34.798 ; 35.56,34.798 36.83,36.068 45.72,36.068 50.8,30.988 ; 35.56,43.815 34.417,42.672 22.098,42.672 21.768,43.002 21.768,45.415 26.695,45.415 33.383,52.103 33.383,52.89 34.036,53.543 42.494,53.543 44.196,55.245 ; 35.56,55.245 36.83,56.515 45.72,56.515 50.8,51.435 ; 45.593,64.008 50.927,69.342 53.543,69.342 54.559,70.358 54.559,72.695 51.816,75.438 ; 45.593,84.328 50.927,89.662 53.543,89.662 54.559,90.678 54.559,93.015 51.816,95.758 ; 45.72,23.368 51.054,28.702 53.67,28.702 54.686,29.718 54.686,32.055 51.943,34.798 ; 45.72,43.815 51.054,49.149 53.67,49.149 54.686,50.165 54.686,52.502 51.943,55.245 ; 48.133,64.008 52.451,68.326 55.042,68.326 56.058,69.342 56.058,71.933 59.436,75.311 ; 48.133,84.328 52.451,88.646 55.042,88.646 56.058,89.662 56.058,92.253 59.436,95.631 ; 48.26,23.368 52.578,27.686 55.169,27.686 56.185,28.702 56.185,31.293 59.563,34.671 ; 48.26,43.815 52.578,48.133 55.169,48.133 56.185,49.149 56.185,51.74 59.563,55.118 ; 70.612,72.136 70.612,74.422 73.914,77.724 ; 70.612,92.456 70.612,94.742 73.914,98.044 ; 70.739,31.496 70.739,33.782 74.041,37.084 ; 70.739,51.943 70.739,54.229 74.041,57.531 ; 82.042,73.914 85.344,70.612 87.63,70.612 ; 84.328,35.433 83.058,36.703 83.058,45.593 88.138,50.673 ; 84.328,44.069 86.03,42.367 86.03,33.909 86.683,33.256 87.47,33.256 94.158,26.568 94.158,21.641 96.571,21.641 96.901,21.971 96.901,34.29 95.758,35.433 ; 84.328,51.816 87.071,54.559 89.408,54.559 90.424,53.543 90.424,50.927 95.758,45.593 ; 84.455,19.685 85.217,20.447 96.52,20.447 97.663,21.59 97.663,41.148 95.758,43.053 ; 84.455,27.686 80.518,31.623 80.518,55.524 83.185,58.191 83.185,60.071 83.197,60.083 83.197,60.464 84.328,61.595 91.948,61.595 97.257,56.286 97.257,52.172 95.758,50.673 ; 84.455,59.436 87.833,56.058 90.424,56.058 91.44,55.042 91.44,52.451 95.758,48.133 ; 84.582,11.303 87.859,11.303 92.151,15.596 v1(92.151,19.304) ; 87.884,25.527 83.185,20.828 83.185,15.494 80.645,12.954 80.645,10.262 80.874,10.033 87.935,10.033 89.637,11.735 92.532,11.735 94.361,9.906 ; 88.138,35.433 90.678,35.433 95.504,30.607 ; 88.138,40.513 86.792,39.167 86.792,34.671 87.376,34.087 89.484,34.087 95.504,28.067
  Top Layer w0.762: 90.908,89.392 90.908,90.241 95.139,94.472 95.139,95.615 ; 94.758,82.788 94.758,83.931 96.917,86.09 96.917,96.377 95.139,98.155
  Bottom Layer w0.508: 2.286,65.405 2.286,76.073 2.667,76.454 7.62,76.454 15.253,68.821 17.564,68.821 20.625,71.882 22.987,71.882 26.264,68.605 32.41,68.605 35.433,71.628 37.541,69.52 55.321,69.52 55.524,69.723 58.039,69.723 ; 2.286,85.725 2.286,96.393 2.667,96.774 7.62,96.774 15.253,89.141 17.564,89.141 20.625,92.202 22.987,92.202 26.264,88.925 32.41,88.925 35.433,91.948 37.541,89.84 55.321,89.84 55.524,90.043 58.039,90.043 ; 2.413,24.765 2.413,35.433 2.794,35.814 7.747,35.814 15.38,28.181 17.691,28.181 20.752,31.242 23.114,31.242 26.391,27.965 32.537,27.965 35.56,30.988 37.668,28.88 55.448,28.88 55.651,29.083 58.166,29.083 ; 2.413,45.212 2.413,55.88 2.794,56.261 7.747,56.261 15.38,48.628 17.691,48.628 20.752,51.689 23.114,51.689 26.391,48.412 32.537,48.412 35.56,51.435 37.668,49.327 55.448,49.327 55.651,49.53 58.166,49.53 ; 3.81,75.184 7.239,75.184 14.402,68.021 17.983,68.021 18.72,68.758 21.387,68.758 22.301,67.843 36.678,67.843 40.513,64.008 ; 3.81,77.724 11.303,77.724 15.621,77.851 19.685,77.851 27.686,77.851 31.496,77.851 31.623,77.978 35.433,77.978 44.069,77.978 51.816,77.978 59.309,77.978 59.436,77.851 66.802,77.851 67.056,77.597 67.183,77.724 73.914,77.724 ; 3.81,95.504 7.239,95.504 14.402,88.341 17.983,88.341 18.72,89.078 21.387,89.078 22.301,88.163 36.678,88.163 40.513,84.328 ; 3.81,98.044 11.303,98.044 15.621,98.171 19.685,98.171 27.686,98.171 31.496,98.171 31.623,98.298 35.433,98.298 44.069,98.298 51.816,98.298 59.309,98.298 59.436,98.171 66.802,98.171 67.056,97.917 67.183,98.044 73.914,98.044 ; 3.937,34.544 7.366,34.544 14.529,27.381 18.11,27.381 18.847,28.118 21.514,28.118 22.428,27.203 36.805,27.203 40.64,23.368 ; 3.937,37.084 11.43,37.084 15.748,37.211 19.812,37.211 27.813,37.211 31.623,37.211 31.75,37.338 35.56,37.338 44.196,37.338 51.943,37.338 59.436,37.338 59.563,37.211 66.929,37.211 67.183,36.957 67.31,37.084 74.041,37.084 ; 3.937,54.991 7.366,54.991 14.529,47.828 18.11,47.828 18.847,48.565 21.514,48.565 22.428,47.65 36.805,47.65 40.64,43.815 ; 3.937,57.531 11.43,57.531 15.748,57.658 19.812,57.658 27.813,57.658 31.623,57.658 31.75,57.785 35.56,57.785 44.196,57.785 51.943,57.785 59.436,57.785 59.563,57.658 66.929,57.658 67.183,57.404 67.31,57.531 74.041,57.531 ; 4.485,69.977 4.485,68.388 ; 4.485,90.297 4.485,88.708 ; 4.612,29.337 4.612,27.748 ; 4.612,49.784 4.612,48.195 ; 9.485,69.977 12.203,67.259 17.196,67.259 18.756,65.699 24.09,65.699 25.527,64.262 ; 9.485,90.297 12.203,87.579 17.196,87.579 18.756,86.019 24.09,86.019 25.527,84.582 ; 9.612,29.337 12.33,26.619 17.323,26.619 18.883,25.059 24.217,25.059 25.654,23.622 ; 9.612,49.784 12.33,47.066 17.323,47.066 18.883,45.506 24.217,45.506 25.654,44.069 ; 9.906,65.405 11.684,65.405 11.978,65.699 13.756,65.699 ; 9.906,85.725 11.684,85.725 11.978,86.019 13.756,86.019 ; 10.033,24.765 11.811,24.765 12.105,25.059 13.883,25.059 ; 10.033,45.212 11.811,45.212 12.105,45.506 13.883,45.506 ; 16.256,70.699 18.785,73.228 26.721,73.228 28.067,71.882 ; 16.256,91.019 18.785,93.548 26.721,93.548 28.067,92.202 ; 16.383,30.059 18.912,32.588 26.848,32.588 28.194,31.242 ; 16.383,50.506 18.912,53.035 26.848,53.035 28.194,51.689 ; v1(19.304,67.615) 19.837,67.081 34.9,67.081 37.973,64.008 ; v1(19.304,87.935) 19.837,87.401 34.9,87.401 37.973,84.328 ; v1(19.431,26.975) 19.964,26.441 35.027,26.441 38.1,23.368 ; v1(19.431,47.422) 19.964,46.888 35.027,46.888 38.1,43.815 ; 22.987,64.262 21.615,64.262 21.427,64.071 8.875,63.997 4.485,68.388 ; 22.987,84.582 21.615,84.582 21.427,84.391 8.875,84.317 4.485,88.708 ; 23.114,23.622 21.742,23.622 21.554,23.431 9.002,23.357 4.612,27.748 ; 23.114,44.069 21.742,44.069 21.554,43.878 9.002,43.804 4.612,48.195 ; 37.973,71.628 39.319,72.974 41.707,72.974 43.053,71.628 44.399,70.282 53.848,70.282 54.432,70.866 55.789,70.866 56.551,71.628 60.198,71.628 60.833,70.993 60.833,68.834 59.182,67.183 ; 37.973,91.948 39.319,93.294 41.707,93.294 43.053,91.948 44.399,90.602 53.848,90.602 54.432,91.186 55.789,91.186 56.551,91.948 60.198,91.948 60.833,91.313 60.833,89.154 59.182,87.503 ; 38.1,30.988 39.446,32.334 41.834,32.334 43.18,30.988 44.526,29.642 53.975,29.642 54.559,30.226 55.916,30.226 56.678,30.988 60.325,30.988 60.96,30.353 60.96,28.194 59.309,26.543 ; 38.1,51.435 39.446,52.781 41.834,52.781 43.18,51.435 44.526,50.089 53.975,50.089 54.559,50.673 55.916,50.673 56.678,51.435 60.325,51.435 60.96,50.8 60.96,48.641 59.309,46.99 ; 48.133,71.628 49.682,73.177 68.642,73.177 70.649,75.184 73.914,75.184 ; 48.133,91.948 49.682,93.497 68.642,93.497 70.649,95.504 73.914,95.504 ; 48.26,30.988 49.809,32.537 68.769,32.537 70.776,34.544 74.041,34.544 ; 48.26,51.435 49.809,52.984 68.769,52.984 70.776,54.991 74.041,54.991 ; 53.213,71.628 55.474,71.628 56.236,72.39 69.023,72.39 70.293,73.66 74.93,73.66 75.565,74.295 75.565,75.751 74.874,76.442 74.688,76.442 74.676,76.454 68.453,76.454 67.056,75.057 ; 53.213,91.948 55.474,91.948 56.236,92.71 69.023,92.71 70.293,93.98 74.93,93.98 75.565,94.615 75.565,96.071 74.874,96.762 74.688,96.762 74.676,96.774 68.453,96.774 67.056,95.377 ; 53.34,30.988 55.601,30.988 56.363,31.75 69.15,31.75 70.42,33.02 75.057,33.02 75.692,33.655 75.692,35.111 75.001,35.802 74.815,35.802 74.803,35.814 68.58,35.814 67.183,34.417 ; 53.34,51.435 55.601,51.435 56.363,52.197 69.15,52.197 70.42,53.467 75.057,53.467 75.692,54.102 75.692,55.558 75.001,56.249 74.815,56.249 74.803,56.261 68.58,56.261 67.183,54.864 ; 70.612,64.516 67.945,67.183 59.182,67.183 ; 70.612,84.836 67.945,87.503 59.182,87.503 ; 70.739,23.876 68.072,26.543 59.309,26.543 ; 70.739,44.323 68.072,46.99 59.309,46.99 ; 82.042,3.81 82.042,11.303 81.915,15.621 81.915,19.685 81.915,27.686 81.915,31.496 81.788,31.623 81.788,35.433 81.788,44.069 81.788,51.816 81.788,59.309 81.915,59.436 81.915,66.802 82.169,67.056 82.042,67.183 82.042,73.914 ; 84.582,3.81 84.582,7.239 91.745,14.402 91.745,17.983 91.008,18.72 91.008,21.387 91.923,22.301 91.923,36.678 95.758,40.513 ; 84.582,73.914 84.582,70.649 86.589,68.642 86.589,49.682 88.138,48.133 ; 84.709,67.056 83.312,68.453 83.312,74.676 83.324,74.688 83.324,74.874 84.015,75.565 85.471,75.565 86.106,74.93 86.106,70.293 87.376,69.023 87.376,56.236 88.138,55.474 88.138,53.213 ; 87.884,28.067 86.538,26.721 86.538,18.785 89.067,16.256 ; 88.138,37.973 86.792,39.319 86.792,41.707 88.138,43.053 89.484,44.399 89.484,53.848 88.9,54.432 88.9,55.789 88.138,56.551 88.138,60.198 88.773,60.833 90.932,60.833 92.583,59.182 ; 89.789,4.485 91.378,4.485 ; 89.789,9.485 92.507,12.203 92.507,17.196 94.067,18.756 94.067,24.09 95.504,25.527 ; 90.043,58.039 90.043,55.524 90.246,55.321 90.246,37.541 88.138,35.433 91.161,32.41 91.161,26.264 87.884,22.987 87.884,20.625 90.945,17.564 90.945,15.253 83.312,7.62 83.312,2.667 83.693,2.286 94.361,2.286 ; v1(92.151,19.304) 92.685,19.837 92.685,34.9 95.758,37.973 ; 94.067,13.756 94.067,11.978 94.361,11.684 94.361,9.906 ; 95.25,70.612 92.583,67.945 92.583,59.182 ; 95.504,22.987 95.504,21.615 95.695,21.427 95.769,8.875 91.378,4.485 ; 4.485,68.388 4.485,64.501 6.629,62.357 51.562,62.357 53.213,64.008 54.864,64.008 58.039,67.183 59.182,67.183 ; 4.485,88.708 4.485,84.821 6.629,82.677 51.562,82.677 53.213,84.328 54.864,84.328 58.039,87.503 59.182,87.503 ; 4.612,27.748 4.612,23.861 6.756,21.717 51.689,21.717 53.34,23.368 54.991,23.368 58.166,26.543 59.309,26.543 ; 4.612,48.195 4.612,44.308 6.756,42.164 51.689,42.164 53.34,43.815 54.991,43.815 58.166,46.99 59.309,46.99 ; 91.378,4.485 95.265,4.485 97.409,6.629 97.409,51.562 95.758,53.213 95.758,54.864 92.583,58.039 92.583,59.182
  Bottom Layer w0.762: 84.852,98.409 87.011,98.409 88.551,99.949 97.171,99.949 97.171,97.647 95.139,95.615 ; 85.233,80.248 90.186,80.248 91.075,79.359 93.869,79.359 94.758,80.248 96.282,81.772 96.282,85.455 95.099,86.638 94.885,86.638 ; 85.233,82.788 85.233,84.058 83.328,85.963 83.328,92.821 83.328,94.345 84.852,95.869 90.059,95.869 ; 85.908,89.392 87.519,89.392 90.948,85.963 92.853,84.058 92.853,81.518 ; 90.059,98.409 94.885,98.409 95.139,98.155 ; 93.234,96.885 93.234,95.234 90.948,92.948 90.948,92.821 92.131,91.638 94.885,91.638

## Keep-outs
Keep-Out Layer:
  the board outline again, w0.2

## Silkscreen, mask and mechanical layers (free items; w line width, h text height)
Top Overlay:
  lines w0.254: 21.717,6.223 ccw(c21.844,7.493) 23.114,7.366 ccw(c21.78,7.302) 21.717,8.636 ; 21.717,67.056 ccw(c21.844,68.326) 23.114,68.199 ccw(c21.78,68.135) 21.717,69.469 ; 21.717,87.376 ccw(c21.844,88.646) 23.114,88.519 ccw(c21.78,88.456) 21.717,89.789 ; 21.844,26.416 ccw(c21.971,27.686) 23.241,27.559 ccw(c21.907,27.495) 21.844,28.829 ; 21.844,46.863 ccw(c21.971,48.133) 23.241,48.006 ccw(c21.907,47.942) 21.844,49.276 ; 34.544,5.842 ccw(c34.544,6.858) 35.56,6.858 ccw(c34.544,6.858) 34.544,7.874 ; 34.544,66.675 ccw(c34.544,67.691) 35.56,67.691 ccw(c34.544,67.691) 34.544,68.707 ; 34.544,86.995 ccw(c34.544,88.011) 35.56,88.011 ccw(c34.544,88.011) 34.544,89.027 ; 34.671,26.035 ccw(c34.671,27.051) 35.687,27.051 ccw(c34.671,27.051) 34.671,28.067 ; 34.671,46.482 ccw(c34.671,47.498) 35.687,47.498 ccw(c34.671,47.498) 34.671,48.514 ; 90.297,21.717 cw(c91.63,21.78) 91.567,23.114 cw(c91.44,21.844) 92.71,21.717 ; 91.059,34.544 cw(c92.075,34.544) 92.075,35.56 cw(c92.075,34.544) 93.091,34.544 ; 0.381,0.381 77.597,0.381 77.597,19.431 0.381,19.431 0.381,0.381 ; 0.381,61.214 0.381,80.264 77.597,80.264 77.597,61.214 0.381,61.214 ; 0.381,81.534 0.381,100.584 77.597,100.584 77.597,81.534 0.381,81.534 ; 0.508,20.574 0.508,39.624 77.724,39.624 77.724,20.574 0.508,20.574 ; 0.508,41.021 0.508,60.071 77.724,60.071 77.724,41.021 0.508,41.021 ; 79.502,0.381 98.552,0.381 98.552,77.216 79.502,77.216 79.502,0.381 ; 79.772,78.232 79.772,100.584 98.187,100.584 98.187,78.232 79.772,78.232
  text "3V" at 92.583,98.425 h1 r90
  text "-" at 88.916,98.409 h1 r90
  text "-" at 83.836,98.028 h1 r90
  text "-" at 33.655,97.79 h1
  text "-" at 42.291,97.79 h1
  text "-" at 49.911,97.79 h1
  text "-" at 57.658,97.79 h1
  text "-" at 17.907,97.663 h1
  text "-" at 25.908,97.663 h1
  text "-" at 65.151,97.663 h1
  text "-" at 2.032,97.536 h1
  text "-" at 9.525,97.536 h1
  text "-" at 72.136,97.536 h1
  text "LED" at 81.423,96.123 h1 r90
  text "+" at 83.709,95.615 h1 r90
  text "+" at 1.905,95.25 h1
  text "+" at 33.655,95.25 h1
  text "+" at 42.291,95.25 h1
  text "+" at 50.038,95.25 h1
  text "+" at 57.531,95.25 h1
  text "+" at 9.525,95.123 h1
  text "+" at 25.908,95.123 h1
  text "+" at 17.907,94.996 h1
  text "+" at 65.278,94.869 h1
  text "+" at 72.136,94.869 h1
  text "+" at 88.662,94.726 h1 r90
  text "2N2222" at 97.806,93.837 h1 r90
  text "33K" at 87.9,93.329 h1 r180
  text "A.I. PCB" at 75.057,93.218 h1.5 r270
  text "+" at 9.144,91.186 h1
  text "-" at 4.064,91.059 h1
  text "5V" at 61.087,90.551 h2 r270
  text "10u" at 5.715,89.789 h1
  text "-" at 95.393,89.773 h1 r90
  text "+" at 59.563,89.662 h1
  text "+" at 90.059,89.138 h1 r90
  text "-" at 87.392,88.884 h1 r90
  text "100K" at 13.462,88.519 h1.5
  text "100U" at 88.789,87.995 h0.8 r90
  text "100U" at 94.504,87.868 h0.8 r90
  text "+" at 95.393,87.868 h1 r90
  text "NE555" at 23.749,87.503 h1.5
  text "120" at 71.247,87.376 h0.95 r90
  text "-" at 59.69,87.122 h1
  text "CD4017" at 38.989,86.995 h2
  text "33K" at 88.281,86.471 h1 r180
  text "A.I. PCB" at 81.677,86.09 h1 r90
  text "10K" at 4.699,85.217 h1
  text "+" at 84.217,82.407 h1 r90
  text "LED CHASER" at 1.016,82.042 h2
  text "-" at 84.344,80.629 h1 r90
  text "LED" at 81.804,79.994 h1 r90
  text "2N2222" at 97.79,78.74 h1 r90
  text "-" at 33.655,77.47 h1
  text "-" at 42.291,77.47 h1
  text "-" at 49.911,77.47 h1
  text "-" at 57.658,77.47 h1
  text "-" at 17.907,77.343 h1
  text "-" at 25.908,77.343 h1
  text "-" at 65.151,77.343 h1
  text "-" at 2.032,77.216 h1
  text "-" at 9.525,77.216 h1
  text "-" at 72.136,77.216 h1
  text "A.I. PCB" at 86.868,75.057 h1.5
  text "+" at 1.905,74.93 h1
  text "+" at 33.655,74.93 h1
  text "+" at 42.291,74.93 h1
  text "+" at 50.038,74.93 h1
  text "+" at 57.531,74.93 h1
  text "+" at 9.525,74.803 h1
  text "+" at 25.908,74.803 h1
  text "+" at 17.907,74.676 h1
  text "+" at 65.278,74.549 h1
  text "+" at 72.136,74.549 h1
  text "A.I. PCB" at 75.057,72.898 h1.5 r270
  text "-" at 82.55,72.136 h1 r90
  text "+" at 85.217,72.136 h1 r90
  text "120" at 92.71,71.247 h0.95 r180
  text "+" at 9.144,70.866 h1
  text "-" at 4.064,70.739 h1
  text "5V" at 61.087,70.231 h2 r270
  text "10u" at 5.715,69.469 h1
  text "+" at 59.563,69.342 h1
  text "100K" at 13.462,68.199 h1.5
  text "NE555" at 23.749,67.183 h1.5
  text "120" at 71.247,67.056 h0.95 r90
  text "-" at 59.69,66.802 h1
  text "CD4017" at 38.989,66.675 h2
  text "+" at 85.217,65.278 h1 r90
  text "-" at 82.423,65.151 h1 r90
  text "10K" at 4.699,64.897 h1
  text "LED CHASER" at 1.143,61.722 h2
  text "5V" at 89.535,61.087 h2
  text "-" at 92.964,59.69 h1 r90
  text "+" at 90.424,59.563 h1 r90
  text "-" at 82.296,57.658 h1 r90
  text "+" at 84.836,57.531 h1 r90
  text "-" at 33.782,57.277 h1
  text "-" at 42.418,57.277 h1
  text "-" at 50.038,57.277 h1
  text "-" at 57.785,57.277 h1
  text "-" at 18.034,57.15 h1
  text "-" at 26.035,57.15 h1
  text "-" at 65.278,57.15 h1
  text "-" at 2.159,57.023 h1
  text "-" at 9.652,57.023 h1
  text "-" at 72.263,57.023 h1
  text "+" at 2.032,54.737 h1
  text "+" at 33.782,54.737 h1
  text "+" at 42.418,54.737 h1
  text "+" at 50.165,54.737 h1
  text "+" at 57.658,54.737 h1
  text "+" at 9.652,54.61 h1
  text "+" at 26.035,54.61 h1
  text "+" at 18.034,54.483 h1
  text "+" at 65.405,54.356 h1
  text "+" at 72.263,54.356 h1
  text "A.I. PCB" at 75.184,52.705 h1.5 r270
  text "+" at 9.271,50.673 h1
  text "-" at 4.191,50.546 h1
  text "5V" at 61.214,50.038 h2 r270
  text "+" at 84.836,50.038 h1 r90
  text "-" at 82.296,49.911 h1 r90
  text "10u" at 5.842,49.276 h1
  text "+" at 59.69,49.149 h1
  text "100K" at 13.589,48.006 h1.5
  text "NE555" at 23.876,46.99 h1.5
  text "120" at 71.374,46.863 h0.95 r90
  text "-" at 59.817,46.609 h1
  text "CD4017" at 39.116,46.482 h2
  text "10K" at 4.826,44.704 h1
  text "-" at 82.296,42.291 h1 r90
  text "+" at 84.836,42.291 h1 r90
  text "LED CHASER" at 1.143,41.656 h2
  text "CD4017" at 93.091,38.989 h2 r90
  text "-" at 33.782,36.83 h1
  text "-" at 42.418,36.83 h1
  text "-" at 50.038,36.83 h1
  text "-" at 57.785,36.83 h1
  text "-" at 18.034,36.703 h1
  text "-" at 26.035,36.703 h1
  text "-" at 65.278,36.703 h1
  text "-" at 2.159,36.576 h1
  text "-" at 9.652,36.576 h1
  text "-" at 72.263,36.576 h1
  text "+" at 2.032,34.29 h1
  text "+" at 33.782,34.29 h1
  text "+" at 42.418,34.29 h1
  text "+" at 50.165,34.29 h1
  text "+" at 57.658,34.29 h1
  text "+" at 9.652,34.163 h1
  text "+" at 26.035,34.163 h1
  text "+" at 18.034,34.036 h1
  text "+" at 65.405,33.909 h1
  text "+" at 72.263,33.909 h1
  text "-" at 82.296,33.655 h1 r90
  text "+" at 84.836,33.655 h1 r90
  text "A.I. PCB" at 75.184,32.258 h1.5 r270
  text "+" at 9.271,30.226 h1
  text "-" at 4.191,30.099 h1
  text "5V" at 61.214,29.591 h2 r270
  text "10u" at 5.842,28.829 h1
  text "+" at 59.69,28.702 h1
  text "100K" at 13.589,27.559 h1.5
  text "NE555" at 23.876,26.543 h1.5
  text "120" at 71.374,26.416 h0.95 r90
  text "-" at 59.817,26.162 h1
  text "CD4017" at 39.116,26.035 h2
  text "-" at 82.423,25.908 h1 r90
  text "+" at 84.963,25.908 h1 r90
  text "10K" at 4.826,24.257 h1
  text "NE555" at 92.583,23.749 h1.5 r90
  text "LED CHASER" at 1.27,21.082 h2
  text "-" at 82.423,17.907 h1 r90
  text "+" at 85.09,17.907 h1 r90
  text "-" at 33.655,16.637 h1
  text "-" at 42.291,16.637 h1
  text "-" at 49.911,16.637 h1
  text "-" at 57.658,16.637 h1
  text "-" at 17.907,16.51 h1
  text "-" at 25.908,16.51 h1
  text "-" at 65.151,16.51 h1
  text "-" at 2.032,16.383 h1
  text "-" at 9.525,16.383 h1
  text "-" at 72.136,16.383 h1
  text "+" at 1.905,14.097 h1
  text "+" at 33.655,14.097 h1
  text "+" at 42.291,14.097 h1
  text "+" at 50.038,14.097 h1
  text "+" at 57.531,14.097 h1
  text "+" at 9.525,13.97 h1
  text "+" at 25.908,13.97 h1
  text "+" at 17.907,13.843 h1
  text "+" at 65.278,13.716 h1
  text "+" at 72.136,13.716 h1
  text "100K" at 91.567,13.462 h1.5 r90
  text "A.I. PCB" at 75.057,12.065 h1.5 r270
  text "+" at 9.144,10.033 h1
  text "-" at 4.064,9.906 h1
  text "-" at 82.55,9.525 h1 r90
  text "+" at 84.963,9.525 h1 r90
  text "5V" at 61.087,9.398 h2 r270
  text "+" at 88.9,9.144 h1 r90
  text "10u" at 5.715,8.636 h1
  text "+" at 59.563,8.509 h1
  text "100K" at 13.462,7.366 h1.5
  text "NE555" at 23.749,6.35 h1.5
  text "120" at 71.247,6.223 h0.95 r90
  text "-" at 59.69,5.969 h1
  text "CD4017" at 38.989,5.842 h2
  text "10u" at 90.297,5.715 h1 r90
  text "10K" at 94.869,4.699 h1 r90
  text "10K" at 4.699,4.064 h1
  text "-" at 89.027,4.064 h1 r90
  text "-" at 82.55,2.032 h1 r90
  text "+" at 84.836,1.905 h1 r90
  text "LED CHASER" at 97.917,1.27 h2 r90
  text "LED CHASER" at 1.143,1.016 h2
Bottom Overlay:
  text "A.I. PCB" at 81.677,93.329 h1 r90
  text "A.I. PCB" at 73.66,82.423 h2.5
  text "A.I. PCB" at 97.663,73.66 h2.5 r90
  text "A.I. PCB" at 73.66,62.103 h2.5
  text "A.I. PCB" at 73.787,41.91 h2.5
  text "A.I. PCB" at 73.787,21.463 h2.5
  text "A.I. PCB" at 73.66,1.27 h2.5